# Altium PCB ZigBee.PcbDoc
Units mil, origin at the board's own origin, x right, y up, seen from the top; angles counter-clockwise.
Board outline 5915.48 x 5915.5 mil, 2 copper layers (Top Layer, Bottom Layer); 72 components, 60 nets, 306 pads, 104 vias.
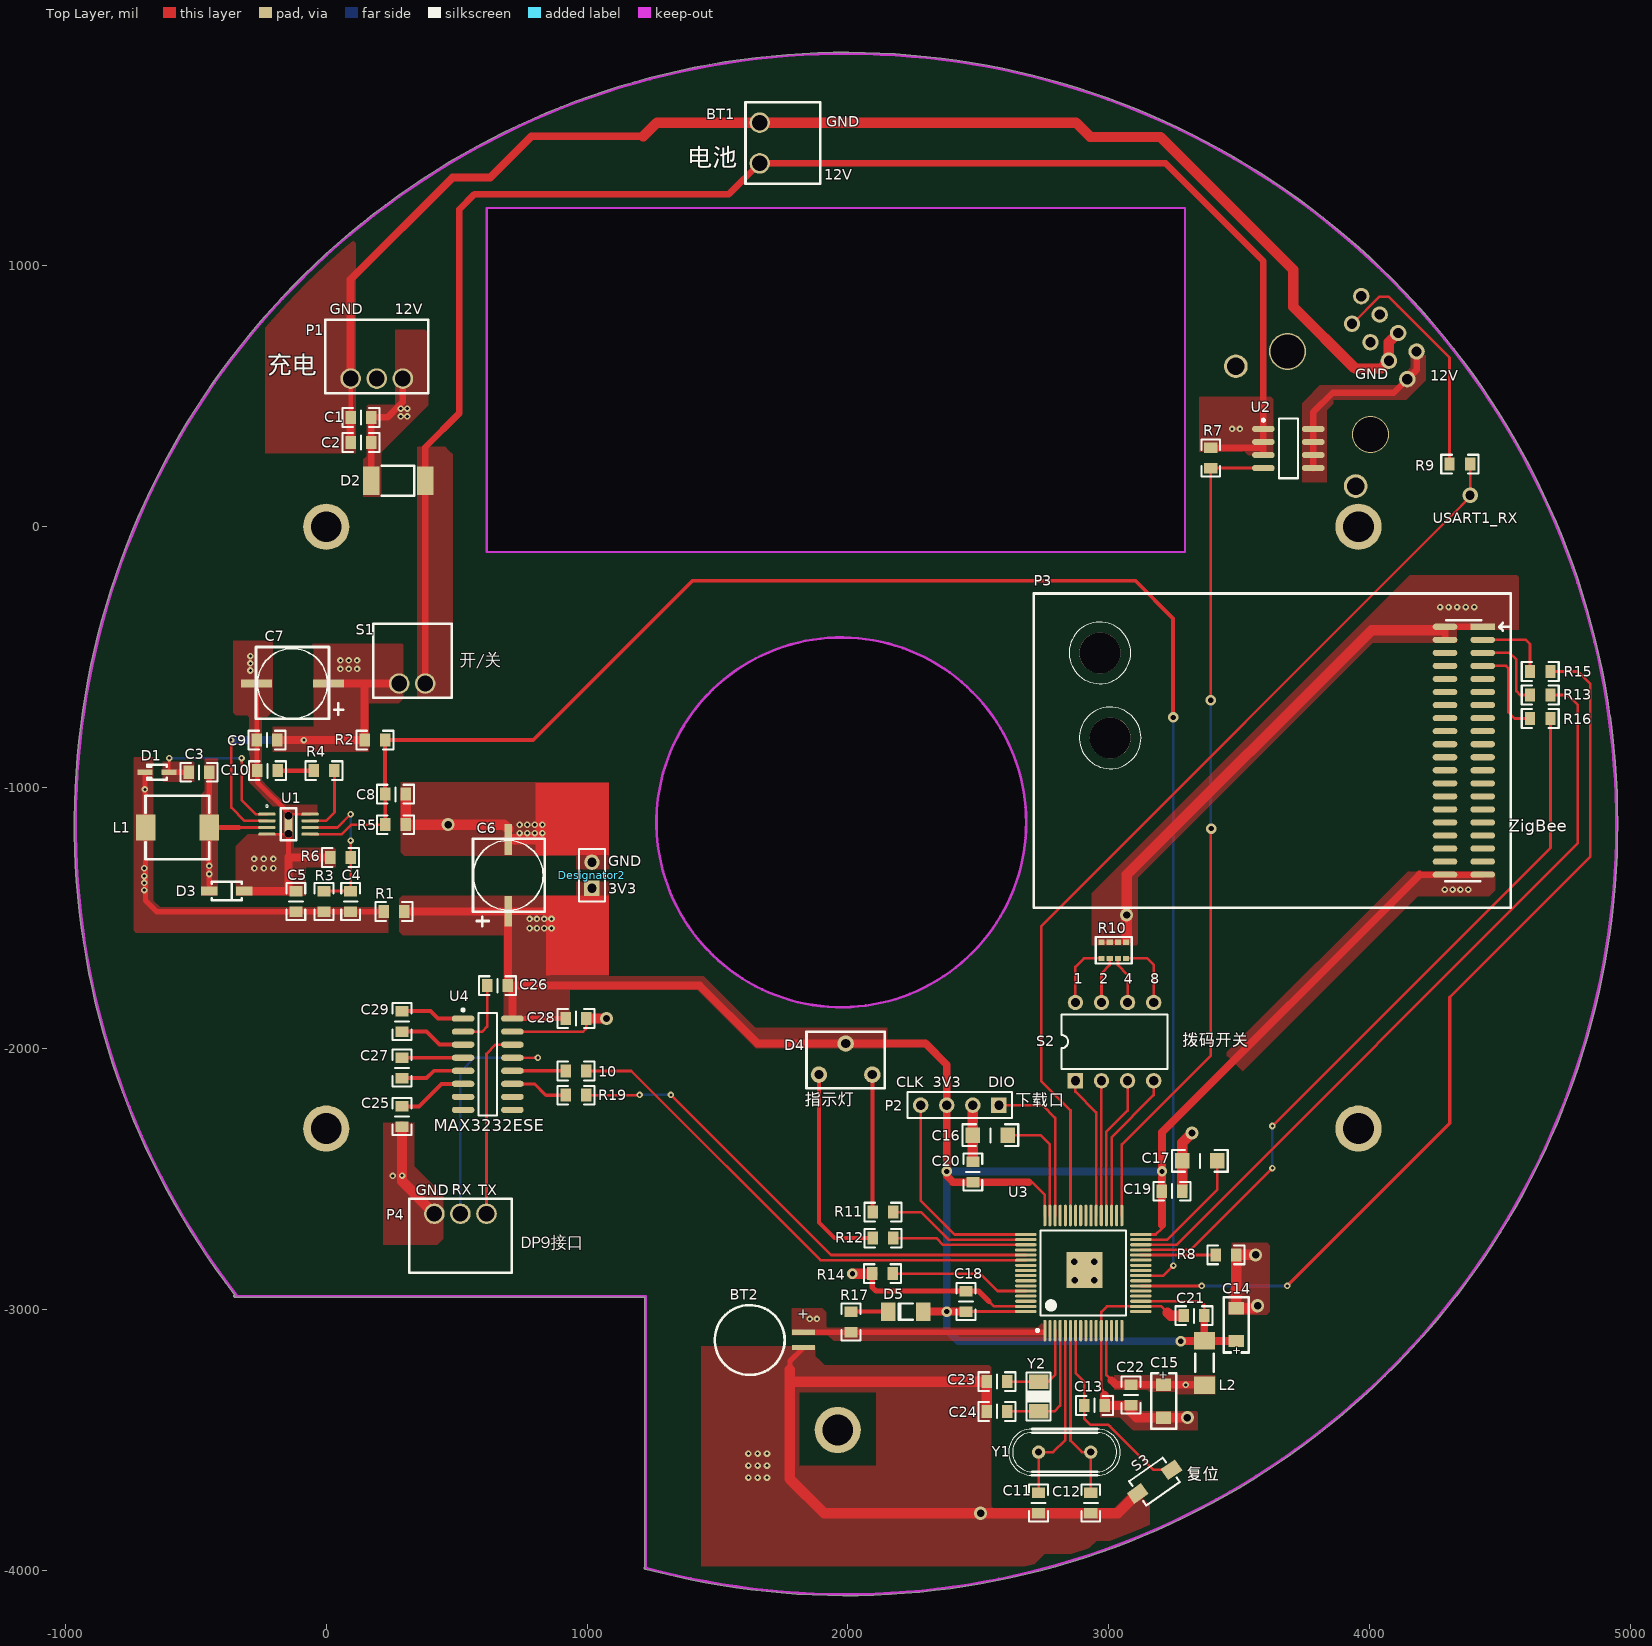
[diagram p0: Top Layer view]
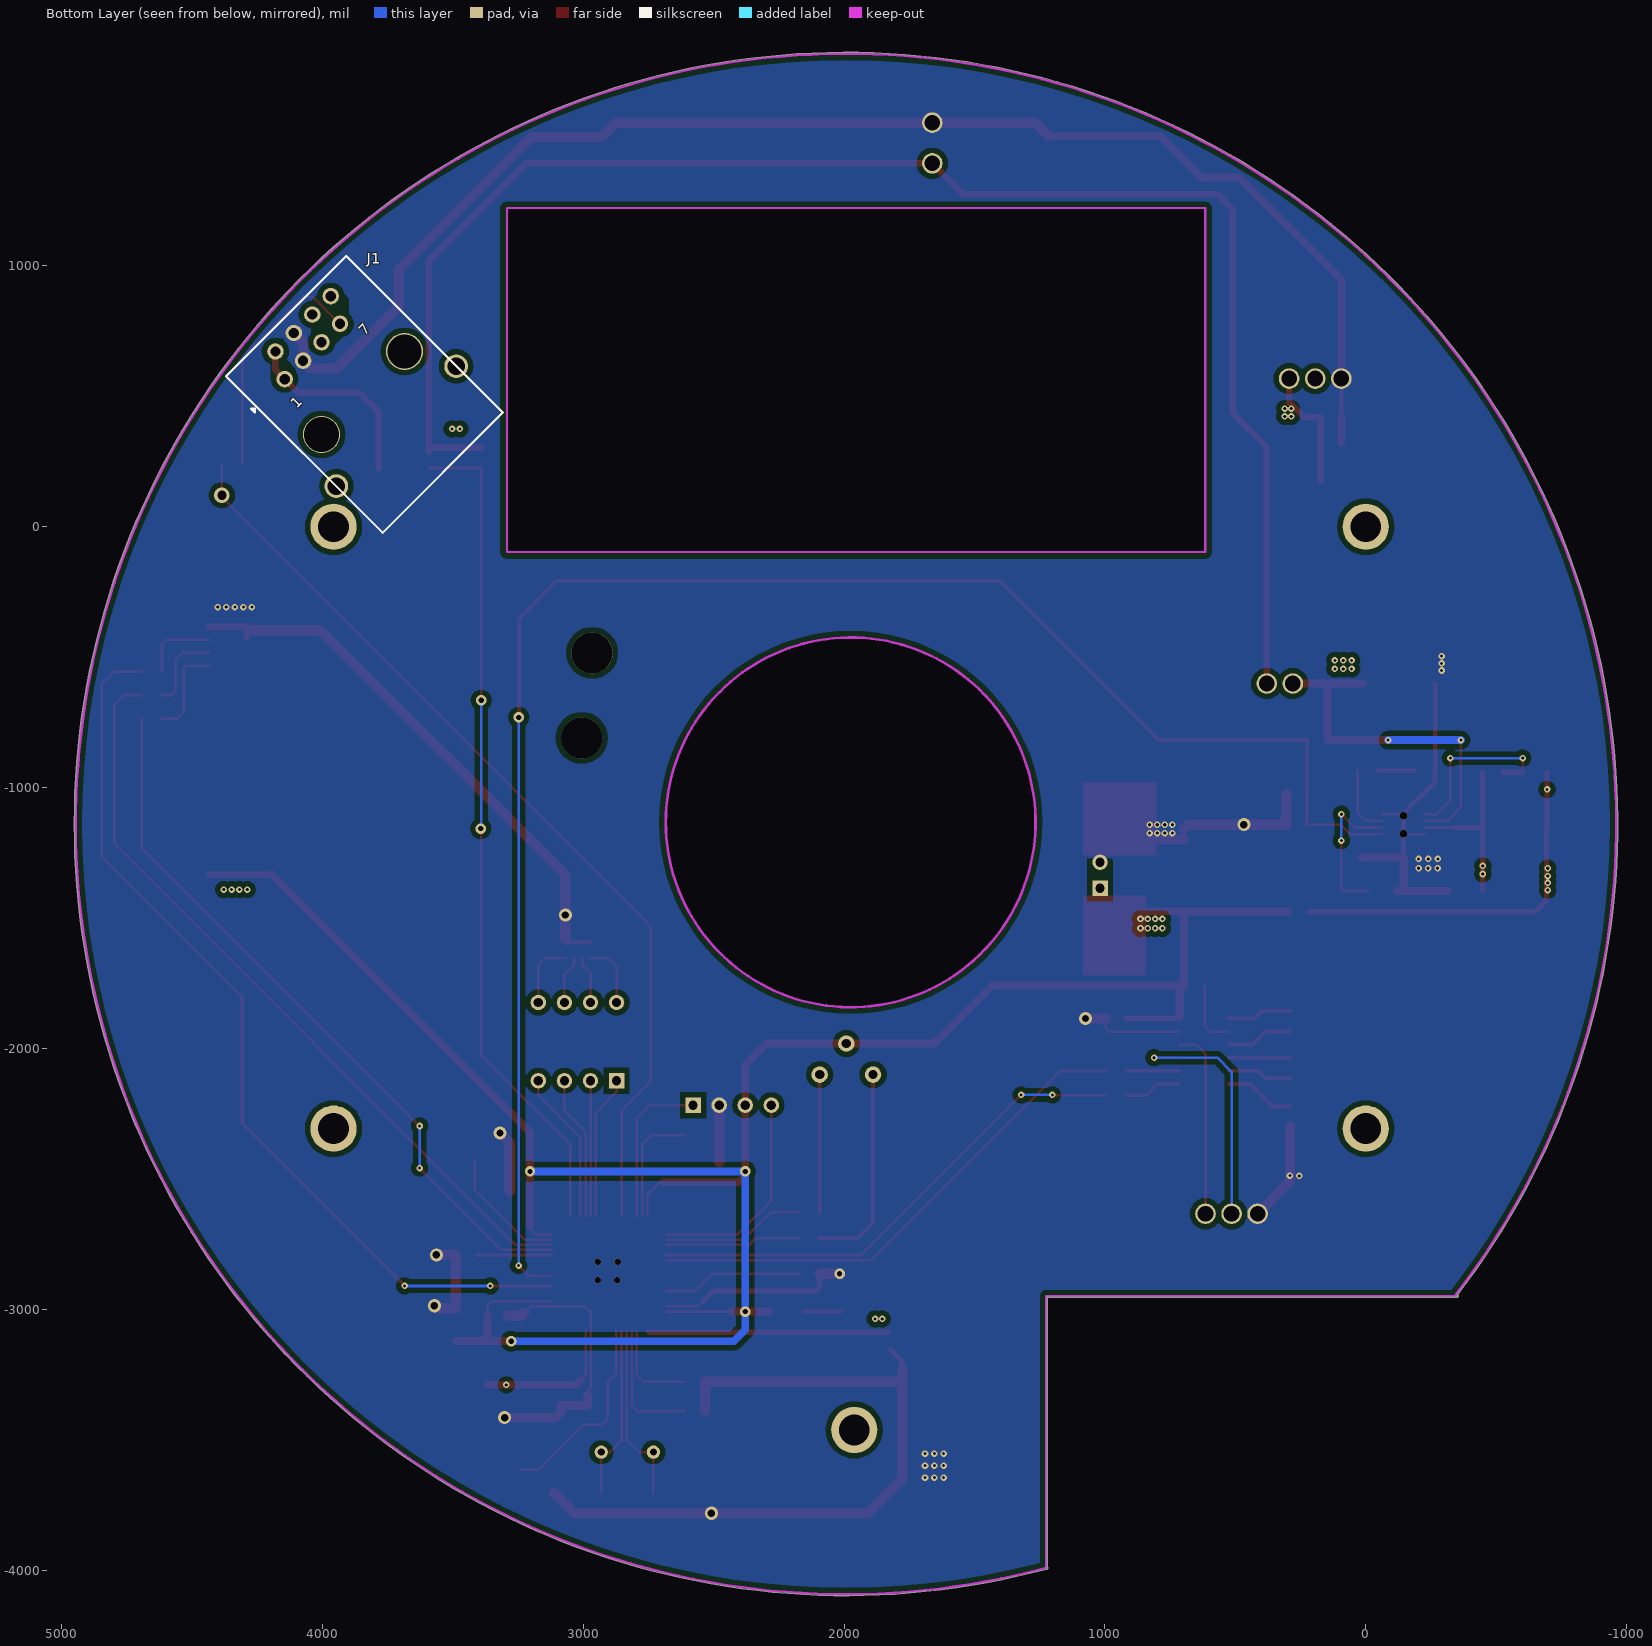
[diagram p1: Bottom Layer view, seen from below]
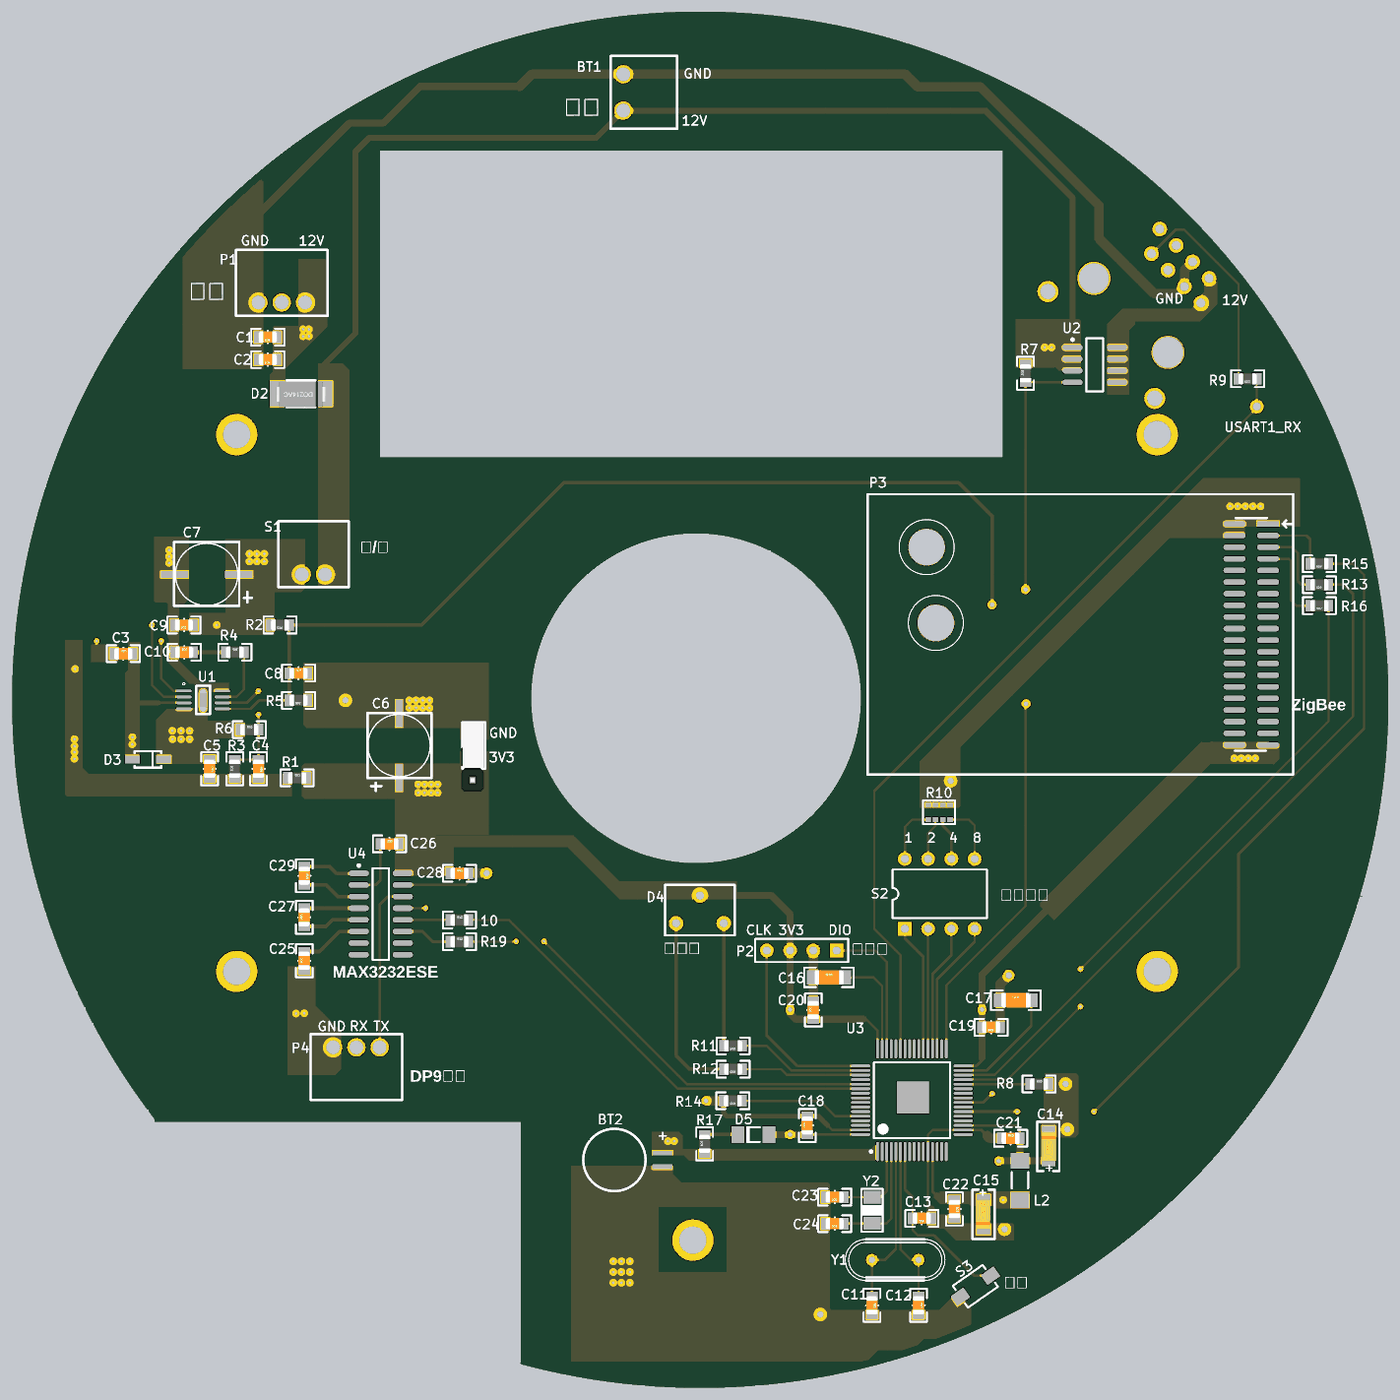
[diagram p2: 3D render of the assembled board from above, using the file's embedded part models]

## Layer stack, top to bottom
Top Layer: signal copper 1.4
Dielectric: dielectric 12.6, FR-4, Dk 4.8
Bottom Layer: signal copper 1.4

## Board outline
-350,-2952.83 1220.72,-2952.83 1220.72,-3987.13 ccw(c1224.35,-3990.58) 1223.05,-3995.42 ccw(c1992.37,-1139.45) 4950.14,-1139.45 ccw(c1992.37,-1139.45) -350.5,-2944.83 ccw(c-350,-2948.82)
cut-out: 615.39,-97.45 615.39,1221.45 3292.55,1221.45 3292.55,-97.45
cut-out: 1265.72,-1133 ccw(c1974.39,-1133) 1974.39,-1841.66 ccw(c1974.39,-1133) 2683.05,-1133 ccw(c1974.39,-1133) 1974.39,-424.34 ccw(c1974.39,-1133)

## Design rules (kind name [scope] priority, off if disabled: settings)
Clearance Inpolygon [Inpolygon] p1: gap=20
Clearance [All] p2: gap=0
HoleToHoleClearance [All] p1: gap=0 allowstackedmicrovias=TRUE
MinimumSolderMaskSliver [All] p1: minsoldermaskwidth=0
PlaneConnect [All] p1: planeconnectstyle=Direct reliefexpansion=20 reliefentries=4 reliefconductorwidth=10 reliefairgap=10
PolygonConnect [All] p1: connectstyle=Direct reliefconductorwidth=10 reliefentries=4 polygonreliefangle="90 Angle"
RoutingVias [All] p1: holewidth=12 width=25 viastyle="Through Hole" minholewidth=1 minwidth=1 maxholewidth=100 maxwidth=100
SilkToSilkClearance [All] p1: silktosilkclearance=0
SilkscreenOverComponentPads [All] p1: minsilkscreentomaskgap=0
SolderMaskExpansion [All] p1: expansion=4
TestPointUsage [All] p1: valid=0 allowmultiple=FALSE
Testpoint [All] p1: side=15 testpointundercomponent=TRUE minsize=40 maxsize=100 preferedsize=60 minholesize=0 maxholesize=40 preferedholesize=32 testpointgrid=1 style=1021 order=0-112345678
Width [All] p1: maxlimit=100 minlimit=5 preferedwidth=10
19 further rules are at their usual default settings.

## Components (designator, comment, footprint, x,y, rotation, side; value= is the part's Value field where it differs from the comment)
10 "0805-0R" 0805 957.57,-2086.09 r0 top (schematic designator R18)
BT1 "ML621S" VH-3.96-2 1661.57,1470.91 r270 top
BT2 "ML621S" ML621 1829.43,-3117.01 r90 top
C1 "0805-1μF" 0805C 133.57,418.91 r180 top
C2 "0805-100nF" 0805C 133.57,322.61 r180 top
C3 "0805-100nF" 0805C -487.06,-941.09 r0 top
C4 "0805-10pF" 0805C 93.57,-1436.09 r90 top
C5 "0805-2.2μF" 0805C -116.43,-1436.09 r90 top
C6 "47uF/25V" SMD-47uF/25V 697.57,-1336.09 r90 top
C7 "47uF/25V" SMD-47uF/25V -129.22,-601.09 r180 top
C8 "0805-1nF" 0805C 265.57,-1025.09 r0 top
C9 "0805-2.2μF" 0805C -226.43,-818.09 r180 top
C10 "0805-1.5nF" 0805C -225.43,-935.09 r0 top
C11 "0805-20pF" 0805C 2730.54,-3742.09 r90 top
C12 "0805-20pF" 0805C 2930.54,-3742.09 r90 top
C13 "0805-20pF" 0805C 2944.57,-3368.09 r180 top
C14 "A-10μF-16V" TANA 3488.57,-3058.06 r90 top
C15 "A-1μF" TANA 3209.57,-3352.12 r270 top
C16 "1206-2.2μF" 1206C 2545.54,-2332.47 r0 top
C17 "1206-2.2μF" 1206C 3348.54,-2430.47 r0 top
C18 "0805-100nF" 0805C 2452.61,-2969.09 r270 top
C19 "0805-100nF" 0805C 3242.57,-2547.13 r180 top
C20 "0805-100nF" 0805C 2478.61,-2473.09 r270 top
C21 "0805-100nF" 0805C 3326.57,-3024.05 r0 top
C22 "0805-100nF" 0805C 3084.54,-3328.09 r90 top
C23 "0805-6.8pF" 0805C 2570.57,-3277.09 r180 top
C24 "0805-6.8pF" 0805C 2570.57,-3391.09 r180 top
C25 "0805-100nF" 0805C 290.57,-2261.09 r270 top
C26 "0805-100nF" 0805C 656.57,-1759.09 r0 top
C27 "0805-100nF" 0805C 290.57,-2074.31 r270 top
C28 "0805-100nF" 0805C 957.57,-1885.09 r0 top
C29 "0805-100nF" 0805C 290.57,-1895.87 r90 top
D1 "SOD323-CMDSH-3/IN914" SOD-323 -648.43,-941.09 r180 top
D2 "SS14" DO-214AC 276.34,175.97 r180 top
D3 "SOD123-MBR130T" SOD123/X.85 -381.43,-1396.09 r180 top
D4 "DS1" 5MM/F5 1991.04,-2040.63 r180 top
D5 "1N4148" SOD-80/MLL34 2221.02,-3008.27 r180 top
Designator2 "Comment" HDR1X2 1018.57,-1386.09 r90 top
J1 "NEPORT" RJ45_8P8C 3903.69,572.87 r225 bottom
L1 "5uH" SMD -570.43,-1153.09 r180 top
L2 "1000 Ohm" INDC4516AM 3366.62,-3205.32 r270 top
P1 "Header 3" XH-2.54-3 193.72,567.91 r0 top
P2 "SWD" HDR1X4 2428.51,-2217.19 r180 top
P3 "WireLess" "SMALL/MIDDLE OEM MODEM" 3699.29,-858.59 r180 top
P4 "Header 3" XH-2.54-3 514.45,-2633.43 r180 top
R1 "0805-0R" 0805 259.57,-1475.09 r0 top
R2 "0805-65K" 0805 186.57,-818.09 r180 top
R3 "0805-17.4K" 0805 -8.43,-1436.09 r270 top
R4 "0805-4.7K" 0805 -7.8,-935.09 r0 top
R5 "0805-10K" 0805 265.57,-1142.09 r180 top
R6 "0805-10K" 0805 54.57,-1268.09 r0 top
R7 "0805-10K" 0805 3390.57,263.91 r270 top
R8 "0805-10K" 0805 3448.57,-2791.05 r0 top
R9 "0805-0R" 0805 4345.15,239.91 r180 top
R10 "10K" 8P4R-0603 3019.07,-1623.55 r0 top
R11 "0805-1K" 0805 2133.57,-2627.13 r180 top
R12 "0805-1K" 0805 2133.57,-2727.13 r180 top
R13 "0805-0R" 0805 4653.57,-645.09 r180 top
R14 "0805-10K" 0805 2132.57,-2863.13 r180 top
R15 "0805-0R" 0805 4653.57,-555.09 r180 top
R16 "0805-0R" 0805 4653.57,-735.09 r180 top
R17 "0805-10K" 0805 2011.61,-3048.34 r270 top
R19 "0805-0R" 0805 957.57,-2179.09 r0 top
S1 "SW-PB" XH-2.54-2 329.57,-601.09 r0 top
S2 "SW-DIP4" DIP-8 3021.82,-1973.61 r0 top
S3 "SW-PB" SW3*4*2MM 3175.15,-3660.17 r215 top
U1 "LT1767EMS8" MS8_N -144.43,-1140.09 r0 top
U2 "APM4435" SOP-8M 3687.94,299.93 r0 top
U3 "STM32F405RGT6" TQFP64_M 2902.05,-2860.61 r90 top
U4 "MAX3232ESE" NSO16_N 619.19,-2060.39 r0 top
Y1 "8MHz" XTAL 2830.57,-3547.09 r0 top
Y2 "32768" 1206CY 2730.57,-3334.09 r90 top

## Footprints (in the part's own frame and the unit in brackets; to place one, negate y for a bottom-side part, rotate by r counter-clockwise, add the part's x,y. Pads: shape width x height; smd on the part's side, far side on the other; paste and mask are expansions set on the pad)
5MM/F5 [mm]
  round 1.6 hole 0.9: 1(-2.6,1.511) 2(2.6,1.511) 3(0,-1.511)
  silkscreen extent -3.79,-2.67 3.81,2.83
8P4R-0603 [mm]
  rect 0.6x0.5 smd: 1(-1.2,-0.787) 2(-0.4,-0.787) 3(0.4,-0.787) 4(1.2,-0.787) 5(1.2,0.787) 6(0.4,0.787) 7(-0.4,0.787) 8(-1.2,0.787)
  silkscreen extent -1.76,-1.27 1.75,1.31
0805 [mil]
  rect 40x50 smd: 1(-39.37,0) 2(39.37,0)
  silkscreen extent -71,-36 71,36, body extent -39,-25 39,24, height 31
0805C [mil]
  rect 40x50 smd: 1(-39.37,0) 2(39.37,0)
  silkscreen extent -71,-36 71,36, body extent -39,-25 39,24, height 31
1206C [mil]
  rect 55x60 smd: 1(-66.93,0) 2(66.93,0)
  silkscreen extent -107,-42 107,42, body extent -62,-32 64,31, height 39
1206CY [mil]
  rect 55x75 smd: 1(-56.5,0) 2(56.5,0)
  silkscreen extent -92,-46 92,46
DIP-8 [mm] "DIP; 8 Leads; Row Spacing 7.62 mm; Pitch 2.54 mm"
  rect 1.5x1.5 hole 0.9: 1(-3.81,-3.81)
  round 1.5 hole 0.9: 2(-1.27,-3.81) 3(1.27,-3.81) 4(3.81,-3.81) 5(3.81,3.81) 6(1.27,3.81) 7(-1.27,3.81) 8(-3.81,3.81)
  silkscreen extent -5.15,-2.65 5.15,2.65
DO-214AC [mm]
  rect 1.6x2.8 smd: 1(2.623,0) 2(-2.623,0)
  silkscreen extent -1.57,-1.45 1.58,1.45, body extent -2.74,-1.35 2.74,1.45, height 2.24
HDR1X2 [mm]
  rect 1.5x1.5 hole 0.9: 1(0,0)
  round 1.5 hole 0.9: 2(2.54,0)
  silkscreen extent -1.27,-1.27 3.81,1.27, body extent -1.24,-1.13 3.84,1.37, height 9.05
HDR1X4 [mm]
  rect 1.5x1.5 hole 0.9: 1(-3.81,0)
  round 1.5 hole 0.9: 2(-1.27,0) 3(1.27,0) 4(3.81,0)
  silkscreen extent -5.08,-1.27 5.08,1.27
INDC4516AM [mm]
  rect 1.7x2 smd: 1(-2.15,0) 2(2.15,0)
  silkscreen extent -0.9,-0.9 0.9,0.9, body extent -2.4,-0.95 2.4,0.95, height 1.8
ML621 [mm]
  rect 0.5x2.2 smd: 1(-0.75,0) 2(0.75,0)
  silkscreen extent -3.41,1.83 3.39,8.63
MS8_N [mm]
  rect 0.8x1.5 smd: 0(0,0)
  oval 1.7x0.3 smd: 1(-2.1,0.975) 2(-2.1,0.325) 3(-2.1,-0.325) 4(-2.1,-0.975) 5(2.1,-0.975) 6(2.1,-0.325) 7(2.1,0.325) 8(2.1,0.975)
  silkscreen extent -2.22,-1.55 0.76,1.87
NSO16_N [mm] "SOIC, 16-Leads, Body 9.9x3.9mm, Pitch 1.27mm, IPC Medium Density"
  oval 2.2x0.6 smd: 1(-2.4,4.445) 2(-2.4,3.175) 3(-2.4,1.905) 4(-2.4,0.635) 5(-2.4,-0.635) 6(-2.4,-1.905) 7(-2.4,-3.175) 8(-2.4,-4.445) 9(2.4,-4.445) 10(2.4,-3.175) 11(2.4,-1.905) 12(2.4,-0.635) 13(2.4,0.635) 14(2.4,1.905) 15(2.4,3.175) 16(2.4,4.445)
  silkscreen extent -2.52,-5 0.9,5.42, body extent -1.95,-4.95 1.95,4.95, height 1.75
RJ45_8P8C [mm]
  round 1.6 hole 1: 1(-4.19,-4.445) 2(-6.73,-3.175) 3(-4.19,-1.905) 4(-6.73,-0.635) 5(-4.19,0.635) 6(-6.73,1.905) 7(-4.19,3.175) 8(-6.73,4.445)
  round 2.3 hole 1.7: 9(6.73,-8.245) 10(6.73,8.245)
  round 3.6 hole 3.4: BO1(2.16,-5.715)
  round 3.6 hole 3.3: BO2(2.16,5.715)
  silkscreen extent -8.42,-8.8 13.13,8.28
"SMALL/MIDDLE OEM MODEM" [mm]
  round 4 hole 4: 0(17.631,-1.25) 0(18.636,-9.525)
  rect 2.4x0.6 smd: 1(-18.636,-12.065)
  oval 2.4x0.6 smd: 2(-14.966,-12.065) 3(-18.636,-10.795) 4(-14.966,-10.795) 5(-18.636,-9.525) 6(-14.966,-9.525) 7(-18.636,-8.255) 8(-14.966,-8.255) 9(-18.636,-6.985) 10(-14.966,-6.985) 11(-18.636,-5.715) 12(-14.966,-5.715) 13(-18.636,-4.445) 14(-14.966,-4.445) 15(-18.636,-3.175) 16(-14.966,-3.175) 17(-18.636,-1.905) 18(-14.966,-1.905) 19(-18.636,-0.635) 20(-14.966,-0.635) 21(-18.636,0.635) 22(-14.966,0.635) 23(-18.636,1.905) 24(-14.966,1.905) 25(-18.636,3.175) 26(-14.966,3.175) 27(-18.636,4.445) 28(-14.966,4.445) 29(-18.636,5.715) 30(-14.966,5.715) 31(-18.636,6.985) 32(-14.966,6.985) 33(-18.636,8.255) 34(-14.966,8.255) 35(-18.636,9.525) 36(-14.966,9.525) 37(-18.636,10.795) 38(-14.966,10.795) 39(-18.636,12.065) 40(-14.966,12.065)
  silkscreen extent -21.37,-15.3 25.09,15.3
SMD [mm]
  rect 1.9x2.5 smd: 1(-3.099,0) 2(3.099,0)
  silkscreen extent -3.1,-3.1 3.1,3.1, body extent -3.34,-3.37 3.36,3.33, height 3
SMD-47uF/25V [mm]
  rect 3x0.75 smd: 1(-3.5,0) 2(3.5,0)
  silkscreen extent -4.95,-3.56 3.56,3.43
SOD123/X.85 [mm]
  rect 1.6x0.85 smd: 1(-1.7,0) 2(1.7,0)
  silkscreen extent -1.45,-0.9 1.45,0.9
SOD-80/MLL34 [mm]
  rect 1.4x1.8 smd: 1(-1.7,0) 2(1.7,0)
  silkscreen extent -0.7,-0.8 0.7,0.8
SOD-323 [mm]
  rect 1.45x0.55 smd: 1(1.175,0) 2(-1.175,0)
  silkscreen extent -0.95,-0.75 0.95,0.75
SOP-8M [mm] "SOP, 8-Leads, Body 5.8x4.0mm (max), Pitch 1.27mm, IPC Medium Density"
  oval 2.2x0.6 smd: 1(-2.425,1.905) 2(-2.425,0.635) 3(-2.425,-0.635) 4(-2.425,-1.905) 5(2.425,-1.905) 6(2.425,-0.635) 7(2.425,0.635) 8(2.425,1.905)
  silkscreen extent -2.55,-2.9 0.93,2.9, body extent -2,-2.9 2,2.9, height 1.75
SW3*4*2MM [mm]
  rect 1.7x1.3 smd: 1(-2.007,0) 2(2.007,0)
  silkscreen extent -1.98,-1.45 2.01,1.45
TANA [mm]
  rect 1.2x1.5 smd: 1(-1.6,0) 2(1.6,0)
  silkscreen extent -2.72,-1.19 2.67,1.22, body extent -1.63,-0.84 1.57,0.76, height 1.6
TQFP64_M [mm] "Thin QFP, 64-Leads, Body 10x10mm, Pitch 0.5mm, IPC Low Density"
  oval 2.1x0.3 smd: 1(-5.6,3.75) 2(-5.6,3.25) 3(-5.6,2.75) 4(-5.6,2.25) 5(-5.6,1.75) 6(-5.6,1.25) 7(-5.6,0.75) 8(-5.6,0.25) 9(-5.6,-0.25) 10(-5.6,-0.75) 11(-5.6,-1.25) 12(-5.6,-1.75) 13(-5.6,-2.25) 14(-5.6,-2.75) 15(-5.6,-3.25) 16(-5.6,-3.75) 33(5.6,-3.75) 34(5.6,-3.25) 35(5.6,-2.75) 36(5.6,-2.25) 37(5.6,-1.75) 38(5.6,-1.25) 39(5.6,-0.75) 40(5.6,-0.25) 41(5.6,0.25) 42(5.6,0.75) 43(5.6,1.25) 44(5.6,1.75) 45(5.6,2.25) 46(5.6,2.75) 47(5.6,3.25) 48(5.6,3.75)
  oval 0.3x2.1 smd: 17(-3.75,-5.6) 18(-3.25,-5.6) 19(-2.75,-5.6) 20(-2.25,-5.6) 21(-1.75,-5.6) 22(-1.25,-5.6) 23(-0.75,-5.6) 24(-0.25,-5.6) 25(0.25,-5.6) 26(0.75,-5.6) 27(1.25,-5.6) 28(1.75,-5.6) 29(2.25,-5.6) 30(2.75,-5.6) 31(3.25,-5.6) 32(3.75,-5.6) 49(3.75,5.6) 50(3.25,5.6) 51(2.75,5.6) 52(2.25,5.6) 53(1.75,5.6) 54(1.25,5.6) 55(0.75,5.6) 56(0.25,5.6) 57(-0.25,5.6) 58(-0.75,5.6) 59(-1.25,5.6) 60(-1.75,5.6) 61(-2.25,5.6) 62(-2.75,5.6) 63(-3.25,5.6) 64(-3.75,5.6)
  silkscreen extent -5.72,-4.15 4.15,4.57, body extent -5,-5 5,5, height 1.6
VH-3.96-2 [mm]
  round 2 hole 1.524: 1(-1.98,0) 2(1.98,0)
  silkscreen extent -3.98,-1.38 3.98,5.89
XH-2.54-2 [mm]
  round 2 hole 1.524: 1(-1.27,0) 2(1.27,0)
  silkscreen extent -3.81,-1.38 3.86,5.82
XH-2.54-3 [mm]
  round 2 hole 1.524: 1(-2.54,0) 2(0,0) 3(2.54,0)
  silkscreen extent -5,-1.45 5,5.74
XTAL [mm]
  round 1.3 hole 0.7: 1(2.54,0) 2(-2.54,0)
  silkscreen extent -5.45,-2.25 5.42,2.25

## Part data
10 R1 R2 R3 R4 R5 R6 R7 R8 R9 R13 R14 R15 R16 R17 R19: library part Res1, "Resistor"
BT1 BT2: library part Battery, "Multicell Battery"
C1 C11 C12 C13 C16 C17 C18 C19 C20 C21 C22 C23 C24 C25 C26 C27 C28 C29: library part Cap, "Capacitor"
C2 C3 C4 C5 C8 C9 C10: library part 普通电容, "Capacitor"
C6 C7: library part 电解电容, "Capacitor"
C14 C15: library part "Cap Pol1", "Polarized Capacitor (Radial)"
D1 D2: library part DIODE
D3: library part TUNNEL, "Tunnel FDiode"
D5: library part "Diode 1N4148", "High Conductance Fast Diode"
J1: "serial to ethernet RJ45 jack"
L1: library part INDUCTOR
L2: library part Inductor, "BLM41PG102SN1L\CBW451616U900"
P1 P4: "Header, 3-Pin"
P2: library part "Header 4", "Header, 4-Pin"
P3: library part "Header 20X2", "Header, 20-Pin, Dual row"
R10: library part RN4
R11 R12: library part "Res Semi", "Semiconductor Resistor"
S1 S3: "Switch"
S2: "DIP Switch"
U3: "ARM Cortex-M4 32-bit MCU+FPU, 210 DMIPS, 1024 kB Flash, 192 kB Internal RAM, 51 I/Os, 64-pin LQFP, -40 to 85 degC, Tray"
U4: "3.0V TO 5.5V, Low-Power, up to 1Mbps, True RS-232 Transceiver Using Four 0.1礔 External Capacitor"
Y1 Y2: library part XTAL, "Crystal Oscillator"

## Free pads (board coordinates)
  round 177.17 hole 118.11: 0(0,-2307.09) 0(0,0) 0(1960.57,-3462.09) 0(3956.69,-2307.09) 0(3956.69,0)
  rect 137.8x137.8 smd: 1(2906.57,-2849.09)

## Via types
v1: diameter 25, hole 12, Top Layer to Bottom Layer, 81 vias
v2: diameter 40, hole 20, Top Layer to Bottom Layer, 8 vias
v3: diameter 50, hole 28, Top Layer to Bottom Layer, 8 vias
v4: diameter 25, hole 25, Top Layer to Bottom Layer, 4 vias
v5: diameter 30, hole 30, Top Layer to Bottom Layer, 2 vias
v6: diameter 59.06, hole 35.43, Top Layer to Bottom Layer, 1 vias

## Nets (pads, with @x,y where several pads share a name; then routed paths per layer and width w, separated by ;. In a path a pad name is that pad's centre, name@x,y a point inside that pad or via, vN(x,y) a via of type N, cw(c..) or ccw(c..) an arc to the next point about the centre after c; other vN are vias at no path point)
3V3: C6.1 C14.1 C18.2 C19.2 C20.2 C21.2 C26.2 C28.1 D4.3 D5.1 Designator2.1 L2.1 P2.3 P3.39 P3.40 R1.2 U3.19 U3.32 U3.48 U3.64 U4.16 | length 9565.3
  Top Layer w10: C18.2@2433.43,-3008.27 C18.2@2433.61,-3008.46 ; C18.2@2433.83,-3008.24 2452.61,-3008.24 U3.64 ; 2692.94,-2512.46 2704.94,-2512.46 2754.42,-2561.93 U3.48 ; U3.19 3352.36,-2968.87 3365.94,-2982.46 C21.2 ; U3.32 3179.69,-2712.97 3203.2,-2689.46 3203.2,-2677.09
  Top Layer w20: U4.16@713.98,-1885.09 C28.1
  Top Layer w25: 4191.07,-1333.59 P3.40 P3.39
  Top Layer w30: R1.2 696.37,-1475.09 C26.2@696.37,-1758.66 ; C6.1 989.78,-1473.88 1018.57,-1445.09 Designator2.1 Designator2.1@1018.57,-1382.09 ; U4.16@713.68,-1880.19 713.68,-1776.82 C26.2 1431.57,-1759.09 1653.61,-1981.13 D4.3 2297.61,-1981.13 2378.51,-2062.02 P2.3 2378.51,-2471.09 2378.51,-2488.02 2402.94,-2512.46 C20.2 2692.94,-2512.46 ; D5.1 v2(2378.57,-3008.27) C18.2@2433.43,-3008.27 ; 3203.2,-2677.09 C19.2 v2@3203.2,-2471.46 ; v2(3203.57,-2471.09) 3203.57,-2321.09 4191.07,-1333.59 ; v2@3276.98,-3120.68 L2.1 ; C21.2 3365.94,-3120.01 L2.1 ; C14.1 3366.99,-3121.05 L2.1
  Bottom Layer w30: v2(3203.57,-2471.09) v2(2378.57,-2471.09) v2(2378.57,-3008.27) 2378.57,-3078.09 2422.57,-3122.09 v2(3275.57,-3122.09)
  other v1: 779.91,-1539.09 807.8,-1539.09 835.69,-1539.09 863.57,-1539.09 779.91,-1503.09 807.8,-1503.09 835.69,-1503.09 863.57,-1503.09 4287.57,-1391.09 4317.57,-1391.09 4347.57,-1391.09 4377.57,-1391.09
12V: BT1.2 D2.2 R7.1 S1.2 U2.1 U2.2 U2.3 | length 6213.8
  Top Layer w25: S1.2 D2.2 379.61,304.95 510.57,435.91 510.57,1216.91 568.57,1274.91 1543.53,1274.91 BT1.2 3217.53,1392.96 3509.74,1100.74 ; R7.1 3588.19,303.28 ; 3582.47,1028.02 3509.74,1100.74 ; 3592.47,287 U2.2 U2.1 3592.47,1018.02 3509.74,1100.74
  other v1: 3472.57,374.91 3502.57,374.91
BAT_ADC: C8.1 R2.1 R5.2 U1.5 U3.24 | length 6582.5
  Top Layer w10: U1.5 60.19,-1178.47 96.57,-1142.09 R5.2 ; U3.24 3209.21,-2870.45 v1(3247.57,-2832.09)
  Top Layer w15: C8.1@225.94,-1024.83 R2.1 793.57,-818.09 1404.57,-207.09 3102.57,-207.09 3246.57,-351.09 v2(3246.57,-731.09) ; R5.2 C8.1
  Bottom Layer w10: v2(3246.57,-731.09) 3246.57,-2831.09 v1(3247.57,-2832.09)
DC12V: C1.1 C2.1 D2.1 P1.3 | length 478
  Top Layer w25: D2.1@172.94,176.09 C2.1 C1.1 234.57,418.91 277.07,461.41 293.72,478.06 P1.3
  other v1: 285.57,422.91 310.57,422.91 285.57,452.91 310.57,452.91
GND: BT1.1 BT2.1 C1.2 C2.2 C5.2 C6.2 C7.2 C8.2 C9.2 C10.1 C11.1 C12.1 C13.1 C14.2 C15.2 C16.1 C17.1 C18.1 C19.1 C20.1 C21.1 C22.1 C23.2 C24.2 C25.2 C28.2 D3.1 Designator2.2 J1.3 J1.4 P1.1 P2.2 P3.1 P3.2 P3.4 P4.3 pad.1 R5.1 R6.1 R8.2 R10.5 R10.6 R10.7 R10.8 R14.2 S3.2 U1.0 U1.4 U1.8 U3.12 U3.18 U3.63 U4.15 | length 16053.2
  Top Layer w10: U1.4 v5@-146.04,-1178.47 ; v5@-141.81,-1101.7 U1.8 ; U4.15 985.27,-1935.39 996.94,-1923.72 C28.2 ; 2540.57,-2970.09 2559.05,-2988.56 U3.63 ; 2983.94,-3331.09 2983.94,-3318.46 2970.95,-3305.46 U3.12 2970.95,-3010.07 2992.46,-2988.56 U3.18 3201.05,-2988.56 3224.84,-3012.35 ; C17.1 C17.1@3281.94,-2430.8
  Top Layer w12: R10.8 R10.7 R10.6 R10.5
  Top Layer w18: C10.1@-265.8,-934.09 C9.2 C7.2@-265.8,-602.31 ; C10.1 -264.8,-978.72 -144.43,-1099.09 v5(-144.43,-1107.7) U1.0 ; C1.2@93.72,418.91 P1.1 ; C6.2 C6.2@697.57,-1158.09
  Top Layer w20: -144.43,-1265.09 v5(-144.43,-1177.09) U1.0 ; 1777.57,-3231.09 1777.57,-3198.4 BT2.1@1823.49,-3152.48 ; R14.2@2093.08,-2863 R14.2 ; R14.2@2093.2,-2870.76 2093.2,-2915.72 2107.2,-2929.72 C18.1 2500.2,-2929.72 2540.57,-2970.09
  Top Layer w25: P3.4@4288.52,-426.45 P3.2@4288.52,-386.59 ; P3.2 P3.1
  Top Layer w30: D3.1 C5.2@-117.06,-1396.09 ; -144.43,-1393.09 -144.43,-1265.09 ; -143.43,-1268.09 R6.1 ; C2.2@93.72,323.09 C1.2@93.72,418.91 ; P1.1 93.72,948.06 484.57,1338.91 628.57,1338.91 786.57,1496.91 1215.91,1496.91
  Top Layer w35: 2983.94,-3331.09 C13.1 3083.91,-3368.09 3083.91,-3393.42 3105.6,-3415.11 C15.2 v3@3300.55,-3415.11
  Top Layer w40: C25.2 v1(290.57,-2487) 290.57,-2509.55 P4.3 ; C8.2 R5.1 v3(467.57,-1142.09) 681.57,-1142.09 C6.2@697.57,-1158.09 ; C6.2 741.57,-1198.29 770.57,-1198.29 799.57,-1198.29 828.57,-1198.29 977.78,-1198.29 1018.57,-1239.09 Designator2.2@1018.57,-1282.09 ; C28.2 v3(1074.57,-1885.09) ; 1215.91,1496.91 1267.87,1548.87 BT1.1 2874.13,1548.87 2929,1494 3197.66,1494 3706,985.66 3706,844 3943.5,606.5 4043.38,606.5 J1.3 4073.37,707.2 J1.4 ; 1777.57,-3231.09 1777.57,-3650.09 1908.94,-3781.46 v3(2508.57,-3781.46) C11.1 C12.1 3034.47,-3781.46 S3.2 ; 1786.57,-3277.09 C23.2 C24.2 ; v2(2017,-2863) R14.2@2093.08,-2863 ; C20.1@2478.51,-2433.61 2478.51,-2332.47 P2.2 ; 3068.31,-1582 v3(3068.31,-1488.09) 3068.31,-1334.69 4007,-396 4274,-396 ; 3224.84,-3012.35 3236.54,-3024.05 C21.1 ; C17.1 3281.61,-2361.05 v3(3318.57,-2324.09) ; C19.1 C17.1@3281.94,-2430.8 ; v3@3561.6,-2995.06 C14.2 3488.57,-2798.05 3491.76,-2794.86 3495.57,-2791.05 v3(3562.57,-2791.09)
  other v1: 1618.57,-3645.09 1653.57,-3645.09 1689.57,-3645.09 1618.57,-3599.09 1653.57,-3599.09 1689.57,-3599.09 1618.57,-3553.09 1653.57,-3553.09 1689.57,-3553.09 255,-2488 -275.43,-1309.09 -238.93,-1309.09 -202.43,-1309.09 -276.43,-1273.09 -239.43,-1273.09 -202.43,-1273.09 741.57,-1174.09 770.57,-1174.09 799.57,-1174.09 828.57,-1174.09 741.57,-1142.09 770.57,-1142.09 799.57,-1142.09 828.57,-1142.09 -290.43,-551.09 -290.43,-524.09 -290.43,-496.09 4269.57,-308.09 4302.32,-308.09 4335.07,-308.09 4367.82,-308.09 4400.57,-308.09
  other v3: 3300.57,-3415.09 3570.57,-2986.09
  other v4: 2868.57,-2889.09 2943.57,-2889.09 2867.57,-2817.09 2944.57,-2817.09
NetBT2_2: BT2.2 R17.2 U3.1 | length 927.6
  Top Layer w10: 2748.01,-3087.48 U3.1
  Top Layer w20: BT2.2 2011.61,-3087.48 2748.01,-3087.48
  other v1: 1853.57,-3036.5 1880.57,-3036.45
NetC3_1: C3.1 D1.2 U1.1 | length 686.5
  Top Layer w10: D1.2 v1@-602.17,-887.83 ; v1(-324.43,-887.09) -324.43,-1048.09 -270.81,-1101.7 U1.1
  Top Layer w20: D1.2 C3.1
  Bottom Layer w10: v1(-601.43,-887.09) v1(-324.43,-887.09)
NetC3_2: C3.2 D3.2 L1.1 U1.3 | length 675.3
  Top Layer w10: -335.22,-1152.88 U1.3
  Top Layer w20: D3.2@-448.43,-1396.02 v1(-448.43,-1331.09) v1(-448.43,-1300.09) L1.1 C3.2@-448.43,-941.83 ; L1.1@-448.22,-1152.88 -335.22,-1152.88
NetC4_1: C4.1 C5.1 D1.1 L1.2 R1.1 R3.2 | length 1419.6
  Top Layer w20: L1.2@-694.68,-1150.83 v1(-694.68,-1007.09) D1.1 ; L1.2 -692.43,-1309.09 -692.43,-1339.09 -692.43,-1365.09 -692.43,-1393.09 -692.43,-1433.09 -650.06,-1475.46 C5.1 R3.2 C4.1 R1.1@219.83,-1475.46
  other v1: -697.43,-1393.09 -697.43,-1365.09 -697.43,-1339.09 -697.43,-1309.09
NetC4_2: C4.2 R3.1 R6.2 U1.6 | length 572.3
  Top Layer w10: U1.6 42.78,-1152.88 v1(93.57,-1102.09) ; R3.1@-8.06,-1396.35 93.57,-1396.35 93.94,-1396.35 R6.2 v1@93.94,-1203.46
  Bottom Layer w10: v1(93.57,-1203.09) v1(93.57,-1102.09)
NetC7_1: C7.1 C9.1 R2.2 S1.1 U1.2 | length 1511
  Top Layer w10: v1@-363.43,-818.09 -363.43,-1077.09 -313.22,-1127.29 U1.2
  Top Layer w30: C9.1 v1(-85.43,-818.09) R2.2 147.2,-607.46 ; C7.1 S1.1
  Bottom Layer w30: v1(-364.43,-818.09) v1(-85.43,-818.09)
  other v1: 54.57,-545.09 86.57,-545.09 118.57,-545.09 54.57,-512.09 86.57,-512.09 118.57,-512.09
NetC10_2: C10.2 R4.1 | length 138.9
  Top Layer w18: C10.2 R4.1
NetC11_2: C11.2 U3.5 Y1.2 | length 696.9
  Top Layer w10: C11.2 2730.54,-3547.13 Y1.2 2786.57,-3547.09 2833.16,-3500.5 U3.5
NetC12_2: C12.2 U3.6 Y1.1 | length 673.7
  Top Layer w10: U3.6 2852.84,-3503.35 2896.57,-3547.09 Y1.1 C12.2@2930.57,-3702.68
NetC13_2: C13.2 S3.1 U3.7 | length 873.1
  Top Layer w10: U3.7 2872.53,-3244.04 2905.2,-3276.72 C13.2 2905.2,-3418.72 2928.57,-3442.09 2997.57,-3442.09 3079.57,-3524.09 ; 3004.57,-3449.09 3079.57,-3524.09 ; S3.1 3170.35,-3614.86 3079.57,-3524.09
NetC16_2: C16.2 U3.47 | length 448.1
  Top Layer w10: C16.2 2737.96,-2332.47 2774.1,-2368.61 U3.47
NetC17_2: C17.2 U3.31 | length 483
  Top Layer w10: U3.31 3224.01,-2732.65 3415.47,-2541.19 C17.2
NetC23_1: C23.1 U3.3 Y2.2 | length 364.2
  Top Layer w10: C23.1@2610.44,-3277.59 Y2.2 2767.07,-3277.59 2793.79,-3250.87 U3.3
NetC24_1: C24.1 U3.4 Y2.1 | length 500
  Top Layer w10: C24.1@2610.44,-3390.59 Y2.1 2792.07,-3390.59 2813.47,-3369.19 U3.4
NetC25_1: C25.1 U4.6 | length 269.9
  Top Layer w15: C25.1 355.94,-2221.72 442.27,-2135.39 U4.6
NetC26_1: C26.1 U4.2 | length 257.7
  Top Layer w10: U4.2 598.27,-1935.39 617.2,-1916.46 C26.1
NetC27_1: C27.1 U4.4 | length 233.7
  Top Layer w15: C27.1@291.03,-2035.39 U4.4
NetC27_2: C27.2 U4.5 | length 245.8
  Top Layer w15: C27.2 384.98,-2113.68 413.27,-2085.39 U4.5
NetC29_1: C29.1 U4.3 | length 254.9
  Top Layer w15: C29.1 383.72,-1935.24 433.88,-1985.39 U4.3
NetC29_2: C29.2 U4.1 | length 246.1
  Top Layer w15: C29.2 399.98,-1856.5 428.88,-1885.39 U4.1
NetD4_1: D4.1 R11.2 | length 526.2
  Top Layer w15: R11.2@2093.4,-2626.32 D4.1
NetD4_2: D4.2 R12.2 | length 797.4
  Top Layer w15: D4.2 1888.68,-2667.19 1948.61,-2727.13 R12.2
NetD5_2: D5.2 R17.1 | length 141.8
  Top Layer w15: R17.1@2012.31,-3008.27 D5.2
NetJ1_1: J1.1 J1.2 U2.5 U2.6 U2.7 U2.8 | length 748.2
  Top Layer w25: U2.5 U2.6 U2.7 U2.8 3783.42,439.42 3858,514 4092.31,514 J1.1 4179.44,601.13 J1.2
NetJ1_7: J1.7 R9.2 | length 1201
  Top Layer w10: J1.7 3932.91,777.91 4036,881 4073,881 4305.78,648.22 ; 4108,846 4305.78,648.22 ; R9.2 4305.78,648.22
NetP2_1: P2.1 U3.46 | length 609.5
  Top Layer w10: P2.1 2744.68,-2217.19 2793.79,-2266.3 U3.46
NetP2_4: P2.4 U3.49 | length 822.7
  Top Layer w10: P2.4 2278.51,-2583.02 2408.46,-2712.97 U3.49
NetP3_3: P3.3 R15.2 | length 293.2
  Top Layer w10: P3.3 4598.07,-433.59 4614.2,-449.72 R15.2
NetP3_5: P3.5 R13.2 | length 318.8
  Top Layer w10: P3.5 4535.71,-483.59 4561.57,-509.45 4561.57,-630.09 4576.57,-645.09 R13.2
NetP3_7: P3.7 R16.2 | length 363.1
  Top Layer w10: P3.7 4522.07,-533.59 4531.57,-543.09 4531.57,-711.09 4555.57,-735.09 R16.2
NetP4_1: P4.1 U4.14 | length 731.4
  Top Layer w10: P4.1@614.45,-2638 P4.1 614.45,-2020.21 649.27,-1985.39 U4.14
NetP4_2: P4.2 U4.13 | length 969.3
  Top Layer w10: U4.13 v1(811.68,-2035.39)
  Bottom Layer w10: P4.2@514.45,-2641 P4.2 514.45,-2089.21 568.27,-2035.39 v1(811.68,-2035.39)
NetR4_2: R4.2 U1.7 | length 266.7
  Top Layer w10: U1.7 -0.63,-1127.29 31.57,-1095.09 R4.2
NetR8_1: R8.1 U3.28 | length 286
  Top Layer w10: U3.28 R8.1@3408.54,-2791.71
NetR10_1: R10.1 S2.8 | length 250
  Top Layer w10: S2.8 2871.82,-1687.18 2904.45,-1654.55 R10.1
NetR10_2: R10.2 S2.7 | length 182.1
  Top Layer w10: S2.7 2971.82,-1711.84 3003.32,-1680.34 R10.2
NetR10_3: R10.3 S2.6 | length 184.4
  Top Layer w10: R10.3 3034.82,-1680.33 3071.82,-1717.33 S2.6
NetR10_4: R10.4 S2.5 | length 260.4
  Top Layer w10: R10.4 3147.55,-1654.55 3171.82,-1678.82 S2.5
NetR11_1: R11.1 U3.50 | length 552.3
  Top Layer w10: R11.1 2279.61,-2627.13 2385.14,-2732.65 U3.50
NetR12_1: R12.1 U3.51 | length 519.1
  Top Layer w10: R12.1 2339.61,-2727.13 2364.83,-2752.34 U3.51
NetR14_1: R14.1 U3.60 | length 537.1
  Top Layer w10: R14.1 2506.61,-2863.13 2572.99,-2929.5 U3.60
NetR18_1: 10.1 U4.12 | length 203.8
  Top Layer w12: U4.12 10.1@917.51,-2085.39
NetR19_1: R19.1 U4.11 | length 222.6
  Top Layer w12: U4.11 798.39,-2135.39 842.09,-2179.09 R19.1
NetS2_1: S2.1 U3.38 | length 549.4
  Top Layer w10: S2.1 2871.82,-2165.33 2951.27,-2244.78 U3.38
NetS2_2: S2.2 U3.37 | length 515.7
  Top Layer w10: U3.37 S2.2@2970.95,-2124.48
NetS2_3: S2.3 U3.36 | length 550.1
  Top Layer w10: U3.36 2990.64,-2319.02 3071.82,-2237.84 S2.3
NetS2_4: S2.4 U3.35 | length 583.4
  Top Layer w10: U3.35 3010.32,-2340.34 3171.82,-2178.84 S2.4
RSTW: R15.1 U3.22 | length 3522.4
  Top Layer w10: 4306.67,-1801.99 4845.57,-1263.09 4845.57,-602.09 4798.57,-555.09 R15.1
  Top Layer w12: U3.22 v1(3355.82,-2909.82) ; v1(3684,-2909.82) 4306.67,-2287.15 4306.67,-1801.99
  Bottom Layer w12: v1(3355.82,-2909.82) v1(3684,-2909.82)
TURN_ON: R7.2 U2.4 U3.33 | length 3206.4
  Top Layer w10: U3.33 3049.69,-2367.97 3390.57,-2027.09 v2@3390.57,-1157.09 ; v2(3390.57,-665.09) R7.2 R7.2@3390.57,225.54 ; R7.2@3390.96,224.93 U2.4
  Bottom Layer w10: v2@3390.57,-1155.09 v2(3390.57,-665.09)
  other v2: 3392.57,-1157.09
UART5_RX: 10.2 U3.54 | length 1985.1
  Top Layer w10: 10.2 1169.27,-2086.09 1894.57,-2811.39 U3.54
UART5_TX: R19.2 U3.53 | length 1937.8
  Top Layer w10: R19.2 v1@1199.91,-2179.09 ; v1(1321,-2178) 1934.71,-2791.71 U3.53
  Bottom Layer w10: v1(1201,-2178) v1(1321,-2178)
USART1_RX: R9.1 U3.43 | length 3610.4
  Top Layer w10: U3.43 2852.84,-2237.35 2740.57,-2125.09 2740.57,-1531.43 4308.57,36.57 4308.57,37.91 4388.07,117.41 v6@4391.57,120.91 ; v6(4384.57,120.91) R9.1@4384.57,239.86
USART3_RX: R13.1 U3.30 | length 2962.4
  Top Layer w10: U3.30 3258.32,-2752.34 4797.57,-1213.09 4797.57,-684.09 4758.57,-645.09 R13.1
USART3_TX: R16.1 U3.29 | length 2798.8
  Top Layer w10: U3.29 3312.64,-2772.02 v1(3626.57,-2458.09) ; v1(3626.57,-2297.09) 4692.94,-1230.72 R16.1
  Bottom Layer w10: v1(3626.57,-2458.09) v1(3626.57,-2297.09)
VDDA: C15.1 C22.2 L2.2 U3.13 | length 561.4
  Top Layer w10: U3.13 2990.64,-3252.15 3010.57,-3272.09
  Top Layer w30: 3010.57,-3272.09 3027.2,-3288.72 C22.2 C15.1@3209.57,-3288.72 ; C15.1 v1(3294.57,-3289.13) L2.2@3365.77,-3289.13
pads on no net: J1.5 J1.6 J1.8 J1.9 J1.10 J1.BO1 J1.BO2 P1.2 P3.0 P3.6 P3.8 P3.9 P3.10 P3.11 P3.12 P3.13 P3.14 P3.15 P3.16 P3.17 P3.18 P3.19 P3.20 P3.21 P3.22 P3.23 P3.24 P3.25 P3.26 P3.27 P3.28 P3.29 P3.30 P3.31 P3.32 P3.33 P3.34 P3.35 P3.36 P3.37 P3.38 U3.2 U3.8 U3.9 U3.10 U3.11 U3.14 U3.15 U3.16 U3.17 U3.20 U3.21 U3.23 U3.25 U3.26 U3.27 U3.34 U3.39 U3.40 U3.41 U3.42 U3.44 U3.45 U3.52 U3.55 U3.56 U3.57 U3.58 U3.59 U3.61 U3.62 U4.7 U4.8 U4.9 U4.10

## Polygon pours and split planes (outlines as drawn)
GND on Top Layer "Top Layer-No Net 1" (solid, remove dead copper, pour order 1000): -356,-437 -205,-437 -205,-707 -219,-721 -226,-728 -248,-728 -248,-972 -222,-998 -154,-1066 -34,-1066 -34,-1103 -35,-1104 -37.3,-1101.7 -124,-1101.7 -124,-1236 -125,-1237 -124,-1236 -124,-1230 30,-1230 35,-1235 36,-1236 36,-1305 -77,-1305 -78,-1306 -79,-1307 -79,-1415 -344,-1415 -346,-1413 -346,-1269 -346,-1224 -318,-1196 -300.47,-1178.47 -227.1,-1178.47 -166,-1178.47 -166,-1093 -166,-1077.51 -173.6,-1069.91 -174.69,-1071 -201,-1071 -204,-1071 -292,-983 -295,-980 -295,-851 -295,-730 -303,-722 -342,-722 -347,-722 -354,-715 -356,-713 -356,-437
NetJ1_1 on Top Layer "Top Layer-No Net 1" (solid, remove dead copper, pour order 1004): 4169,691 4203,657 4214,657 4214,561 4154,501 4139,486 3861,486 3861,472 3839,450 3836,447 3836,171 3744,171 3740,175 3741,176 3741,359 3741,474 3754,487 3809,542 4119,542 4119,573 4151,605 4158,612 4158,678 4158,680 4169,691
GND on Top Layer "Top Layer-No Net 1" (solid, remove dead copper, pour order 1003): 218,-2285 338,-2285 338,-2452 419,-2533 448,-2562 448,-2729 448,-2730 425,-2753 218,-2753 218,-2285
GND on Top Layer "Top Layer-No Net 1" (solid, remove dead copper, pour order 1002): 1435,-3138 1438,-3141 1875,-3141 1875,-3179 1893,-3197 1910,-3214 2538,-3214 2541,-3214 2547,-3220 2549,-3222 2549,-3343 2549,-3755 2553,-3759 2556,-3762 3019,-3762 3021,-3762 3095,-3688 3157,-3750 3157,-3851 3101,-3851 3088,-3864 3066,-3886 2993,-3886 2954,-3886 2904,-3936 2766,-3936 2755,-3936 2704,-3987 2702,-3985 1437,-3985 1437,-3140 1435,-3138
12V on Top Layer "Top Layer-No Net 1" (solid, remove dead copper, pour order 1001): 3346,498 3619,498 3620,498 3628,490 3630,488 3630,274 3534,274 3517,291 3513,287 3347,287 3347,497 3346,498
GND on Top Layer "Top Layer-No Net 1" (solid, remove dead copper, pour order 1000): 2935,-1604 3106,-1604 3111,-1599 3111,-1416 3111,-1345 3122,-1334 4011,-445 4334,-445 4334,-395 4571,-395 4571,-192 4566,-187 4565,-186 4301,-186 4154,-186 3922,-418 2935,-1405 2935,-1604
GND on Top Layer "Top Layer-No Net 1" (solid, remove dead copper, pour order 1000): 113.57,281.91 113.57,618.91 113.57,1086.91 87.57,1112.91 -233.43,791.91 -233.43,281.91 113.57,281.91
DC12V on Top Layer "Top Layer-No Net 1" (solid, remove dead copper, pour order 1002): 262.57,755.91 379.57,755.91 390.57,744.91 390.57,508.91 390.57,464.91 212.57,286.91 210.57,284.91 210.57,114.91 142.57,114.91 139.57,111.91 142.57,114.91 142.57,257.91 154.57,269.91 154.57,361.91 154.57,460.91 160.57,466.91 264.57,466.91 264.57,753.91 262.57,755.91
GND on Top Layer "Top Layer-No Net 1" (solid, remove dead copper, pour order 1003): 285.57,-980.09 797.57,-980.09 802.57,-980.09 833.57,-1011.09 848.57,-1026.09 848.57,-1261.09 299.57,-1261.09 285.57,-1247.09 285.57,-980.09
3V3 on Top Layer "Top Layer-No Net 1" (solid, remove dead copper, pour order 1004): 712.57,-1414.09 842.57,-1414.09 855.57,-1427.09 857.57,-1429.09 857.57,-1722.09 1446.57,-1722.09 1586.57,-1862.09 1644.57,-1920.09 2149.57,-1920.09 2149.57,-1994.09 2151.57,-1996.09 2149.57,-1998.09 1650.57,-1998.09 1645.57,-1998.09 1426.57,-1779.09 1421.57,-1774.09 933.57,-1774.09 933.57,-1891.09 931.57,-1893.09 680.57,-1893.09 680.57,-1567.09 677.57,-1564.09 676.57,-1565.09 394.57,-1565.09 292.57,-1565.09 282.57,-1555.09 279.57,-1552.09 279.57,-1427.09 279.57,-1426.09 290.57,-1415.09 291.57,-1414.09 712.57,-1414.09
GND on Top Layer "Top Layer-No Net 1" (solid, remove dead copper, pour order 1006): 3471.57,-2745.09 3606.57,-2745.09 3618.57,-2757.09 3617.57,-2758.09 3617.57,-3009.09 3609.57,-3017.09 3605.57,-3021.09 3458.57,-3021.09 3458.57,-2928.09 3467.57,-2919.09 3471.57,-2915.09 3471.57,-2745.09
3V3 on Top Layer "Top Layer-No Net 1" (solid, remove dead copper, pour order 1007): 4199.57,-1323.09 4475.57,-1323.09 4481.57,-1329.09 4481.57,-1379.09 4481.57,-1393.09 4457.57,-1417.09 4456.57,-1416.09 4183.57,-1416.09 4183.57,-1417.09 3513.57,-2087.09 3455.57,-2029.09 3452.57,-2029.09 3452.57,-2015.09 4147.57,-1320.09 4150.57,-1323.09 4199.57,-1323.09
VDDA on Top Layer "Top Layer-No Net 1" (solid, remove dead copper, pour order 1011): 3021.57,-3253.09 3406.57,-3253.09 3409.57,-3256.09 3409.57,-3326.09 3266.57,-3326.09 3260.57,-3320.09 3259.57,-3319.09 3259.57,-3315.09 3155.57,-3315.09 3149.57,-3309.09 3148.57,-3308.09 3021.57,-3308.09 3021.57,-3253.09
GND on Top Layer "Top Layer-No Net 1" (solid, remove dead copper, pour order 1012): 2967.57,-3329.09 2968.57,-3328.09 3020.57,-3328.09 3020.57,-3349.09 3021.57,-3350.09 3022.57,-3351.09 3125.57,-3351.09 3125.57,-3390.09 3323.57,-3390.09 3335.57,-3390.09 3338.57,-3393.09 3341.57,-3396.09 3341.57,-3464.09 3093.57,-3464.09 3090.57,-3461.09 3042.57,-3413.09 2967.57,-3413.09 2967.57,-3329.09
GND on Top Layer "Top Layer-No Net 1" (solid, remove dead copper, pour order 1013): 958.57,-1259.09 958.57,-1312.09 1081.57,-1312.09 1082.57,-1313.09 1084.57,-1311.09 1084.57,-1261.09 960.57,-1261.09 958.57,-1259.09
3V3 on Top Layer "Top Layer-No Net 1" (solid, remove dead copper, pour order 1014): 957.57,-1415.09 958.57,-1414.09 958.57,-1360.09 1082.57,-1360.09 1083.57,-1361.09 1083.57,-1414.09 958.57,-1414.09 957.57,-1415.09
NetC4_1 on Top Layer "Top Layer-No Net 1" (solid, remove dead copper, pour order 1015): -738.43,-885.09 -736.43,-883.09 -662.43,-883.09 -662.43,-1433.09 -638.43,-1457.09 -637.43,-1458.09 -141.43,-1458.09 234.57,-1458.09 236.57,-1456.09 237.57,-1457.09 237.57,-1556.09 -729.43,-1556.09 -738.43,-1547.09 -738.43,-885.09
NetC3_1 on Top Layer "Top Layer-No Net 1" (solid, remove dead copper, pour order 1016): -626.43,-901.09 -507.43,-901.09 -505.43,-903.09 -506.43,-904.09 -506.43,-977.09 -624.43,-977.09 -625.43,-978.09 -626.43,-977.09 -626.43,-901.09
NetC3_2 on Top Layer "Top Layer-No Net 1" (solid, remove dead copper, pour order 1017): -466.43,-890.09 -411.43,-890.09 -410.43,-891.09 -416.43,-897.09 -416.43,-1413.09 -479.43,-1413.09 -480.43,-1414.09 -479.43,-1413.09 -479.43,-1142.09 -479.43,-1025.09 -468.43,-1014.09 -466.43,-1012.09 -466.43,-890.09
12V on Top Layer "Top Layer-No Net 1" (solid, remove dead copper, pour order 1018): 348.57,305.91 455.57,305.91 470.57,290.91 484.57,276.91 484.57,-658.09 351.57,-658.09 349.57,-656.09 349.57,-358.09 349.57,304.91 348.57,305.91
NetC7_1 on Top Layer "Top Layer-No Net 1" (solid, remove dead copper, pour order 1019): -57.43,-449.09 280.57,-449.09 291.57,-449.09 295.57,-453.09 294.57,-454.09 294.57,-618.09 294.57,-660.09 283.57,-671.09 277.57,-677.09 163.57,-677.09 163.57,-860.09 161.57,-862.09 -205.43,-862.09 -205.43,-766.09 -47.43,-766.09 -47.43,-459.09 -57.43,-449.09
NetBT2_2 on Top Layer "Top Layer-No Net 1" (solid, remove dead copper, pour order 1001): 1785.57,-2996.45 1901.57,-2996.45 1912.57,-3007.45 1916.57,-3011.45 1916.57,-3062.45 1916.57,-3065.45 1920.57,-3069.45 1921.57,-3070.45 2047.57,-3070.45 2725.57,-3070.45 2748.57,-3047.45 2749.57,-3048.45 2756.57,-3048.45 2756.57,-3109.45 2750.57,-3115.45 2750.57,-3120.45 1944.57,-3120.45 1922.57,-3098.45 1784.57,-3098.45 1784.57,-2997.45 1785.57,-2996.45
GND on Bottom Layer "Top Layer-No Net 1" (solid, remove dead copper, pour order 1001): 1914.85,1819.91 1927.84,1832.91 2469.43,1830.91 2693.27,1799.91 2837.16,1764.91 3031.02,1687.91 3193.9,1631.91 3382.76,1539.91 3612.59,1411.91 3847.41,1232.91 3975.32,1130.91 4118.21,1033.91 4215.14,884.91 4333.05,726.91 4434.98,593.91 4628.83,317.91 4732.76,116.91 4763.73,8.91 4793.71,-69.09 4860.66,-249.09 4896.64,-438.09 4948.6,-639.09 4978.57,-806.09 4972.58,-916.09 4978.57,-1062.09 4976.58,-1292.09 4961.59,-1425.09 4915.62,-1690.09 4833.68,-2012.09 4674.8,-2401.09 4526.91,-2687.09 4339.5,-2934.69 3929.35,-3379.09 3688.53,-3556.09 3543.64,-3654.09 3385.76,-3748.09 3229.87,-3826.09 2839.16,-3973.09 2566.36,-4034.09 2408.48,-4068.09 2294.56,-4081.09 2218.62,-4091.09 2150.67,-4093.09 2057.74,-4096.09 1945.82,-4099.09 1869.88,-4090.09 1740.97,-4081.09 1621.06,-4071.09 1552.11,-4061.09 1487.16,-4046.09 1406.22,-4030.09 1336.27,-4012.09 1214.37,-3984.09 1226.51,-2935.28 1226.05,-2934.82 -357.47,-2932.09 -580.3,-2623.09 -644.26,-2485.09 -684.23,-2412.09 -739.19,-2320.09 -849.11,-2067.09 -903.07,-1853.09 -968.02,-1452.09 -991,-774.09 -925.05,-512.09 -886.08,-342.09 -866.09,-165.09 -716.2,221.91 -604.29,404.91 -484.38,547.91 -385.45,699.91 -227.57,914.91 -44.7,1082.91 309.04,1370.91 757.7,1620.91 1284.31,1799.91

## Keep-outs
Keep-Out Layer:
  circle w10: c1974.39,-1133 r708.66
  lines w8: -350,-2948.82 1224.8,-2948.82 ; 1224.73,-3989.09 1224.73,-2949.28 ; 615.39,-97.45 3292.55,-97.45 3292.55,1221.45 615.39,1221.45 615.39,-97.45
  lines w10: -344.43,-2944.49 cw(c1992.37,-1139.45) 1224.35,-3990.58

## Other copper
Top Layer:
  rectangle net GND: 802.57,-1261.09 1084.57,-980.09
  rectangle net 3V3: 842.57,-1721.09 1083.57,-1414.09
  pour cut-out: 1814.57,-3320.09 2106.57,-3320.09 2106.57,-3598.09 1817.57,-3598.09 1814.57,-3601.09
Bottom Layer:
  pour cut-out: 3957.86,934.14 3897.57,873.86 3897.57,752.67 3993.22,657.03 4042.02,705.82 4042.02,761.32 4093.96,813.26 3973.07,934.14
  pour cut-out: 4146.71,720.57 4146.71,649.86 4103.1,606.25 4103.1,551.8 4110.44,551.8 4134.64,527.6 4163.44,527.6 4196.9,561.07 4196.88,561.09 4196.88,633.67 4233.61,670.4 4183.44,720.57
  pour cut-out: 969.05,-1277.69 969.05,-1362.75 1066.25,-1362.75 1067,-1362 1066.83,-1361.83 1066.83,-1273.16 973.58,-1273.16

## Silkscreen, mask and mechanical layers (free items; w line width, h text height)
Top Overlay:
  text "GND" at 1916.57,1532.91 h40
  text "电池" at 1386.57,1358.91 h120
  text "12V" at 1908.57,1330.91 h40
  text "GND" at 13.57,814.91 h40
  text "12V" at 262.57,814.91 h40
  text "GND" at 3943.57,565.91 h40
  text "充电" at -225.43,563.91 h120
  text "12V" at 4231.57,558.91 h40
  text "USART1_RX" at 4240.57,13.91 h40
  text "开/关" at 511.57,-548.09 h80
  text "ZigBee" at 4532.57,-1184.09 h80
  text "GND" at 1080.57,-1301.09 h40
  text "3V3" at 1080.57,-1406.09 h40
  text "1" at 2865,-1752 h40
  text "2" at 2963,-1752 h40
  text "4" at 3058,-1752 h40
  text "8" at 3159,-1752 h40
  text "拨码开关" at 3281.57,-2004.09 h80
  text "CLK" at 2184.57,-2148.09 h40
  text "3V3" at 2324.57,-2148.09 h40
  text "DIO" at 2538.57,-2148.09 h40
  text "指示灯" at 1834.57,-2233.09 h80
  text "下载口" at 2641.57,-2235.09 h80
  text "MAX3232ESE" at 411.57,-2333.09 h80
  text "RX" at 481.57,-2561.09 h40
  text "GND" at 343.57,-2562.09 h40
  text "TX" at 583.57,-2562.09 h40
  text "DP9接口" at 745,-2781 h80
  text "复位" at 3296.57,-3668.45 h80
Bottom Overlay:
  text "B" at 275.57,-5136.09 h40 r90
  text "A" at 277.57,-5411.09 h40 r90

## Text inside footprints (layer, text, board x,y; h text height)
BT2: Top Overlay "+" at 1846.43,-3042.54 h40 r90
C14: Top Overlay "+" at 3503.57,-3175.05 h30 r90
C15: Top Overlay "+" at 3194.57,-3235.13 h30 r270
J1: Bottom Overlay "7" at 3837.54,729.39 h40 r315; Bottom Overlay "1" at 4097.21,451.25 h40 r315